# Altium PCB FilletObjects.PcbDoc
Units mil, origin at the board's own origin, x right, y up, seen from the top; angles counter-clockwise.
Board outline 4763.78 x 3149.61 mil, 2 copper layers (Top Layer, Bottom Layer); 1 components, 1 nets, 4 pads, 0 vias.
Unrouted connection lines stored in the file: 3.
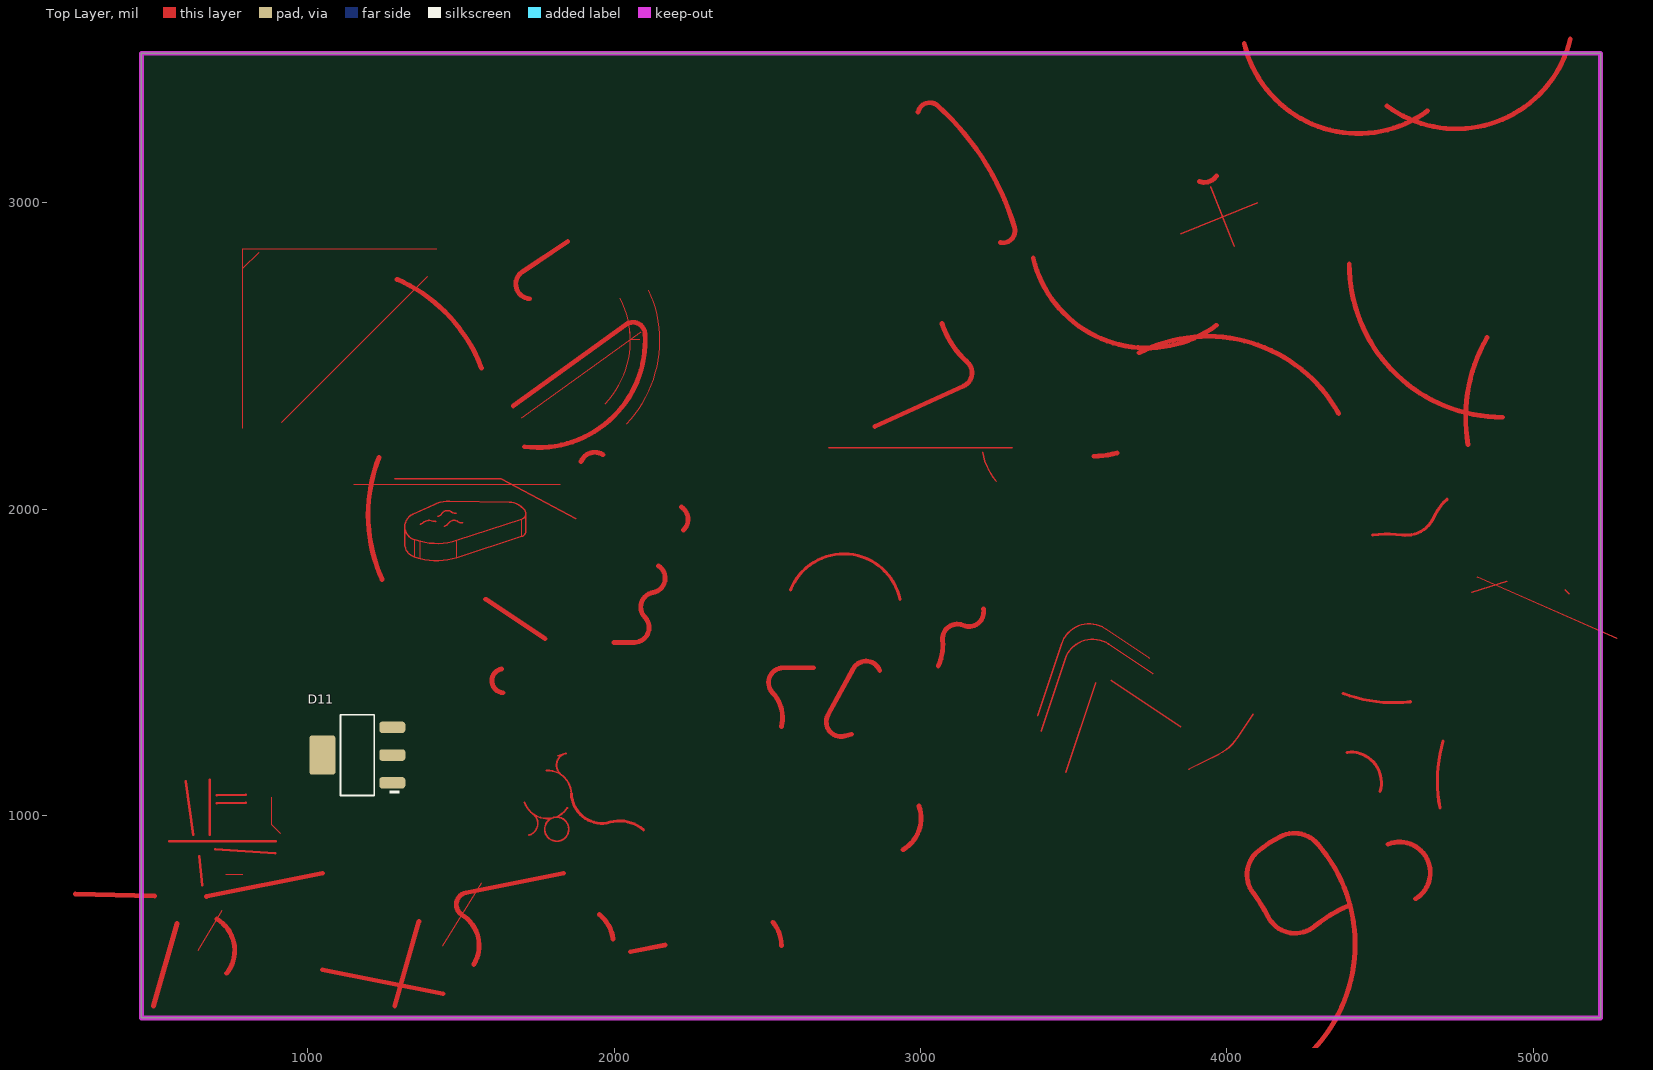
[diagram p0: Top Layer view]
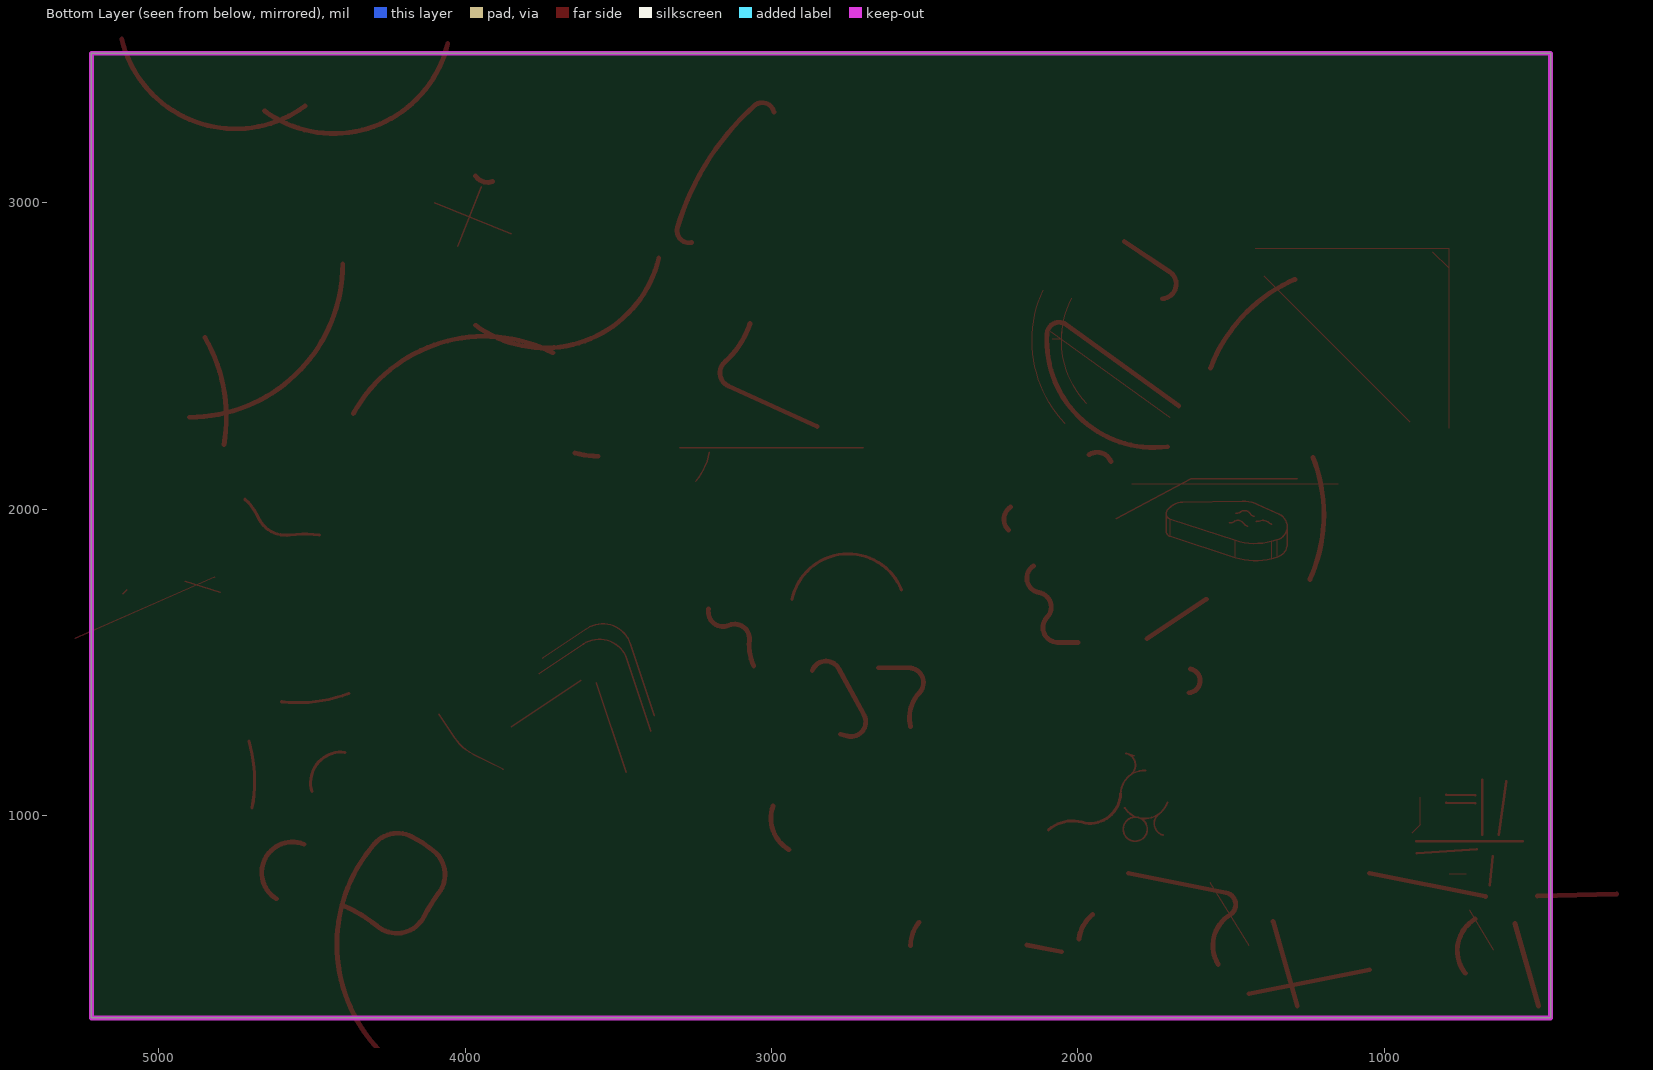
[diagram p1: Bottom Layer view, seen from below]

## Layer stack, top to bottom
Top Layer: signal copper 1.4
Dielectric: dielectric 12.6, FR-4, Dk 4.8
Bottom Layer: signal copper 1.4

## Board outline
456.69,338.58 456.69,3488.19 5220.47,3488.19 5220.47,338.58

## Design rules (kind name [scope] priority, off if disabled: settings)
Clearance [All] p1: gap=5.91
Length [All] p1: maxlimit=100000 minlimit=0
PolygonConnect [All] p1: connectstyle=Relief reliefconductorwidth=10 reliefentries=4 polygonreliefangle="90 Angle" airgapwidth=10
RoutingVias [All] p1: holewidth=28 width=50 viastyle="Through Hole" minholewidth=28 minwidth=50 maxholewidth=28 maxwidth=50
SilkToSolderMaskClearance [IsPad] p1: minsilkscreentomaskgap=3.94 clearancetoexposedcopper=TRUE
SolderMaskExpansion [All] p1: expansion=1.97
Width [All] p1: maxlimit=196.85 minlimit=3.94 preferedwidth=7.87
27 further rules are at their usual default settings.

## Components (designator, comment, footprint, x,y, rotation, side; value= is the part's Value field where it differs from the comment)
D11 "Comment" SOT223-3.7x6.7x1.8-4/2.3x7.0 1161.42,1196.85 r90 top

## Footprints (in the part's own frame and the unit in brackets; to place one, negate y for a bottom-side part, rotate by r counter-clockwise, add the part's x,y. Pads: shape width x height; smd on the part's side, far side on the other; paste and mask are expansions set on the pad)
SOT223-3.7x6.7x1.8-4/2.3x7.0 [mm] "SOT223 3.7mm X 6.7mm X 1.8mm Body, 4-Pin, 2.3mm Pitch, 7.0mm Pin Size"
  rrect50% 0.95x2.15 smd: 1(-2.3,-2.9) 2(0,-2.9) 3(2.3,-2.9)
  rrect20% 3.25x2.15 smd: 4(0,2.9)
  silkscreen extent -3.35,-3.5 3.35,1.4, body extent -3.25,-3.48 3.25,3.48, height 1.8

## Nets (pads, with @x,y where several pads share a name; then routed paths per layer and width w, separated by ;. In a path a pad name is that pad's centre, name@x,y a point inside that pad or via, vN(x,y) a via of type N, cw(c..) or ccw(c..) an arc to the next point about the centre after c; other vN are vias at no path point)
Net1:  | length 1709.7
  Top Layer w5.91: 1707.29,1042.17 ccw(c1781.65,1068.07) 1734.74,1004.83 ; 1721.95,935.46 ccw(c1711.14,973.32) 1734.74,1004.83 ; 1734.64,1004.9 cw(c1711.14,973.32) 1734.74,1004.83 ; 1779.38,1146.78 cw(c1781.65,1068.07) 1860.34,1070.69 ; 1816.93,1194.88 1840.12,1201.51 ccw(c1851.01,1163.67) 1827.89,1131.81 ; 1840.19,1201.53 ccw(c1851.01,1163.67) 1840.14,1201.51 1842.81,1202.28 ; 1847.15,1024.38 cw(c1781.65,1068.07) 1808.26,993.97 ; 1734.74,1004.83 ccw(c1781.65,1068.07) 1796.23,990.7 ; 1796.23,990.7 ccw(c1812.45,954.82) 1851.82,954.82 ccw(c1812.45,954.82) 1808.26,993.97 ; 1796.23,990.7 ccw(c1781.65,1068.07) 1808.26,993.97 ; 1796.23,990.7 cw(c1812.45,954.82) 1808.26,993.97
  Top Layer w9.84: 1860.34,1070.69 ccw(c1960.29,1074.02) 1986.69,977.57 cw(c2017.87,863.65) 2095.94,952.28
  Top Layer w15.75: 496.06,377.95 572.76,646.39 ; 669.32,735.44 1047.24,811.02
pads on no net: D11.1 D11.2 D11.3 D11.4
copper on no net: | length 28627.4
  Top Layer w0.98: 641.73,559.06 721.01,690.21 ; 732.28,807.09 787.4,807.09 ; 1440.94,574.8 1567.46,779.2
  Top Layer w1: 1349.4,1843.22 1349.4,1899.34 ; 1367.27,1838.42 1367.27,1894.54 ; 1485.69,1841.5 1485.69,1897.63 ; 1698.05,1910.56 1698.05,1966.69 ; 1698.43,2297.5 2088.61,2579.56 ; 2053.15,2578.74 2053.15,2553.93 2082.68,2553.93
  Top Layer w1.97: 787.4,2263.78 787.4,2850.39 1421.26,2850.39 ; 787.4,2785.43 840.55,2838.58 ; 915.16,2283.27 1391.73,2759.84 ; 1149.61,2080.71 1823.58,2080.71
  Top Layer w3.94: 881.89,1059.06 881.89,968.5 909.45,940.94
  Top Layer w4: 1971.58,2344.09 ccw(c1751.42,2550.44) 2020.18,2687.63 ; 2041.63,2278.45 ccw(c1751.42,2550.44) 2113.46,2715.15
  Top Layer w5: 1282.97,2099.4 1631.04,2099.4 1875.25,1968.19 ; 1316.33,1942.45 1316.33,1886.33 ccw(c1360.97,1886.33) 1349.4,1843.22 1367.27,1838.42 ccw(c1421.28,2039.55) 1485.69,1841.5 1698.05,1910.56 ccw(c1691.97,1929.28) 1711.65,1929.28 1711.65,1985.41 ; 1366.52,1950.59 ccw(c1363.1,1969.97) 1376.09,1955.18 cw(c1396.41,1932.05) 1407.6,1960.74 ccw(c1414.75,1979.08) 1418.16,1959.69 ; 1424.08,1975.83 ccw(c1420.66,1995.22) 1437.42,1984.89 cw(c1455.6,1973.68) 1468.85,1990.43 ccw(c1481.06,2005.86) 1484.48,1986.48 ; 1445.7,1944.46 ccw(c1442.29,1963.85) 1459.04,1953.52 cw(c1477.22,1942.31) 1490.47,1959.06 ccw(c1502.68,1974.49) 1506.1,1955.11 ; 2700,2200 3300,2200 ; 3203.04,2185.27 ccw(c3400,2220) 3246.79,2091.44 ; 3382.91,1325.55 3461.56,1561.5 cw(c3550.64,1531.81) 3602.77,1609.9 3747.13,1513.54 ; 3394.06,1275.03 3472.71,1510.98 cw(c3561.79,1481.29) 3613.91,1559.39 3758.27,1463.03 ; 3474.39,1139.96 3572.1,1433.09 ; 3622.51,1440.85 3849.12,1289.59 ; 3850.59,2899.56 4100.18,2999.65 ; 3876.67,1151.21 3974.56,1200.16 ccw(c3904.98,1339.32) 4034.44,1253.02 4086.23,1330.71 ; 3947.25,3051.56 4024.95,2858.12 ; 4800.26,1728.09 4914.7,1764.95 ; 4818.39,1778.12 5273.27,1578.42 ; 5104.83,1736.1 5117.76,1723.16 ; 1342.31,1983 ccw(c1360.97,1942.45) 1349.4,1899.34 1367.27,1894.54 ccw(c1421.28,2095.68) 1485.69,1897.63 1698.05,1966.69 ccw(c1691.97,1985.41) 1704.63,2000.48 1694.77,2008.76 ccw(c1656.18,1962.83) 1657.09,2022.81 1463.42,2025.73 ccw(c1461.61,1905.12) 1411.18,2014.69 1342.31,1983
  Top Layer w7.87: 547.24,915.35 894.59,915.35 ; 600.78,1110.83 625.35,935.96 ; 645.67,866.14 655.55,772.17 ; 679.13,935.95 679.13,1116.3 ; 696.85,889.76 893.22,876.03 ; 702.76,1039.37 797.23,1041.02 ; 702.76,1064.96 797.23,1066.61
  Top Layer w10: 2575.36,1735.67 cw(c2749.59,1665.98) 2933.3,1704.21 ; 4380.4,1397.87 ccw(c4545.06,1833.07) 4599.12,1370.91 ; 4393.36,1205.88 cw(c4404.98,1106.56) 4500.88,1078.22 ; 4476.67,1915.49 cw(c4523.37,1561.77) 4571.54,1915.29 ccw(c4585.04,2014.38) 4676.62,1974.23 cw(c4824.09,1909.59) 4719.56,2032.06 ; 4695.7,1024.82 cw(c5152.88,1111.41) 4706.64,1243.25
  Top Layer w15.75: 240.4,742.9 500,736.22 ; 703.46,661.17 cw(c641.73,559.06) 734.68,484.22 ; 1047.24,496.06 1440.94,417.32 ; 1232.28,2169.29 ccw(c1709.59,1981.54) 1242.42,1769.81 ; 1283.46,377.95 1362.2,653.54 ; 1291.34,2750 cw(c1086.59,2279.73) 1566.64,2460.36 ; 1541.53,512.9 ccw(c1440.94,574.8) 1503.1,675.23 cw(c1523.82,708.71) 1516.1,747.32 1834.65,811.02 ; 1580.14,1705.76 1773.62,1576.77 ; 1632.32,1478.04 ccw(c1640.04,1439.43) 1637.04,1400.18 ; 1670.31,2336.4 2038.09,2602.27 cw(c2061.16,2570.36) 2100.45,2572.89 cw(c1751.42,2550.44) 1707.48,2203.47 ; 1724.41,2686.86 cw(c1726.81,2734.8) 1700.1,2774.68 1848.43,2874.02 ; 1892.1,2155.08 cw(c1936.78,2137.55) 1963.41,2177.49 ; 1951,676.46 cw(c1877,582) 1996.19,595.92 ; 1998.75,1564.84 2065.9,1564.84 ccw(c2065.9,1612.84) 2100.18,1646.43 cw(c2134.46,1680.03) 2126.44,1727.36 ccw(c2118.42,1774.68) 2145.04,1814.62 ; 2053.19,554.41 2166.9,576.93 ; 2220.01,2006.42 cw(c2193.39,1966.49) 2226.75,1931.98 ; 2517.93,651.13 cw(c2426,574) 2546,574 ; 2545.8,1289.07 ccw(c2431.58,1319.11) 2517.14,1400.53 cw(c2551.92,1433.61) 2551.92,1481.61 2651.13,1481.61 ; 2775.29,1264.67 2752.19,1258.79 cw(c2740.35,1305.31) 2698.21,1328.28 2780.08,1478.48 cw(c2822.22,1455.51) 2866.99,1472.82 ; 2850.47,2269.59 3140.83,2401.71 ccw(c3121.27,2444.71) 3152.76,2479.93 cw(c3346.69,2696.8) 3070.28,2606 ; 2942.91,887.87 ccw(c2883.86,990.16) 2994.85,1030.55 ; 2992.08,3296.86 cw(c3030.3,3287.39) 3056.73,3316.57 cw(c2470.9,2670) 3306.8,2920.03 cw(c3269.08,2908.75) 3261.16,2870.18 ; 3058.27,1487.46 ccw(c2900.19,1557.34) 3072.39,1572.23 cw(c3120.21,1576.36) 3139.31,1620.4 ccw(c3158.42,1664.43) 3205.35,1674.49 ; 3368.12,2819.44 ccw(c3739.98,2908.11) 3966.68,2600.3 ; 3439.9,3972.75 cw(c3020.87,3207.47) 3783.13,3631.97 ; 3508.81,3999.22 cw(c3302.13,3151.56) 3928.55,3758.88 ; 3565.84,2172.46 ccw(c3565.84,2442.94) 3642.24,2183.47 ; 3713.79,2510.14 cw(c3937.15,2074.54) 4365.41,2311.67 ; 3910.86,3069.4 ccw(c3926.84,3113.86) 3966.31,3087.9 ; 4057.32,3519.61 ccw(c4429.17,3608.28) 4655.88,3300.47 ; 4265.45,217.33 ccw(c3917.08,578.58) 4296.43,907.15 ccw(c4220.84,841.68) 4174.91,930.51 ccw(c4373.3,546.84) 4103.86,884.43 ccw(c4166.24,806.27) 4086.65,745.73 cw(c3687.19,441.92) 4134.4,669.66 ccw(c4223.51,715.04) 4287.52,638.21 cw(c4563.99,306.35) 4402.27,706.87 ; 4400,2800 ccw(c4900,2800) 4900,2300 ; 4523.13,3315.83 ccw(c4749.83,3623.64) 5121.69,3534.98 ; 4526.76,905.78 cw(c4564.39,813.13) 4616.08,727.52 ; 4787.9,2209.7 cw(c5300,2300) 4849.67,2560 ; 48,0 ccw(c0,0) 48,0

## Keep-outs
Keep-Out Layer:
  the board outline again, w15.75

## Silkscreen, mask and mechanical layers (free items; w line width, h text height)
Mechanical 15:
  lines w1.97: 2287.4,1906.28 2287.4,2626.4 cw(c2438.98,2626.4) 2331.79,2733.58 2343.78,2745.57 cw(c2392.5,2696.85) 2392.5,2765.75 2887.02,2765.75 ; 2887.8,2765.75 ccw(c2887.8,2917.32) 2994.97,2810.14